# Altium PCB PCB_all_try_6_traced.PcbDoc (part 3 of 5)
Units mm, origin at the board's own origin, x right, y up, seen from the top; angles counter-clockwise.
Board outline 425 x 295 mm, 2 copper layers (Top Layer, Bottom Layer); 484 components, 419 nets, 1569 pads, 847 vias.
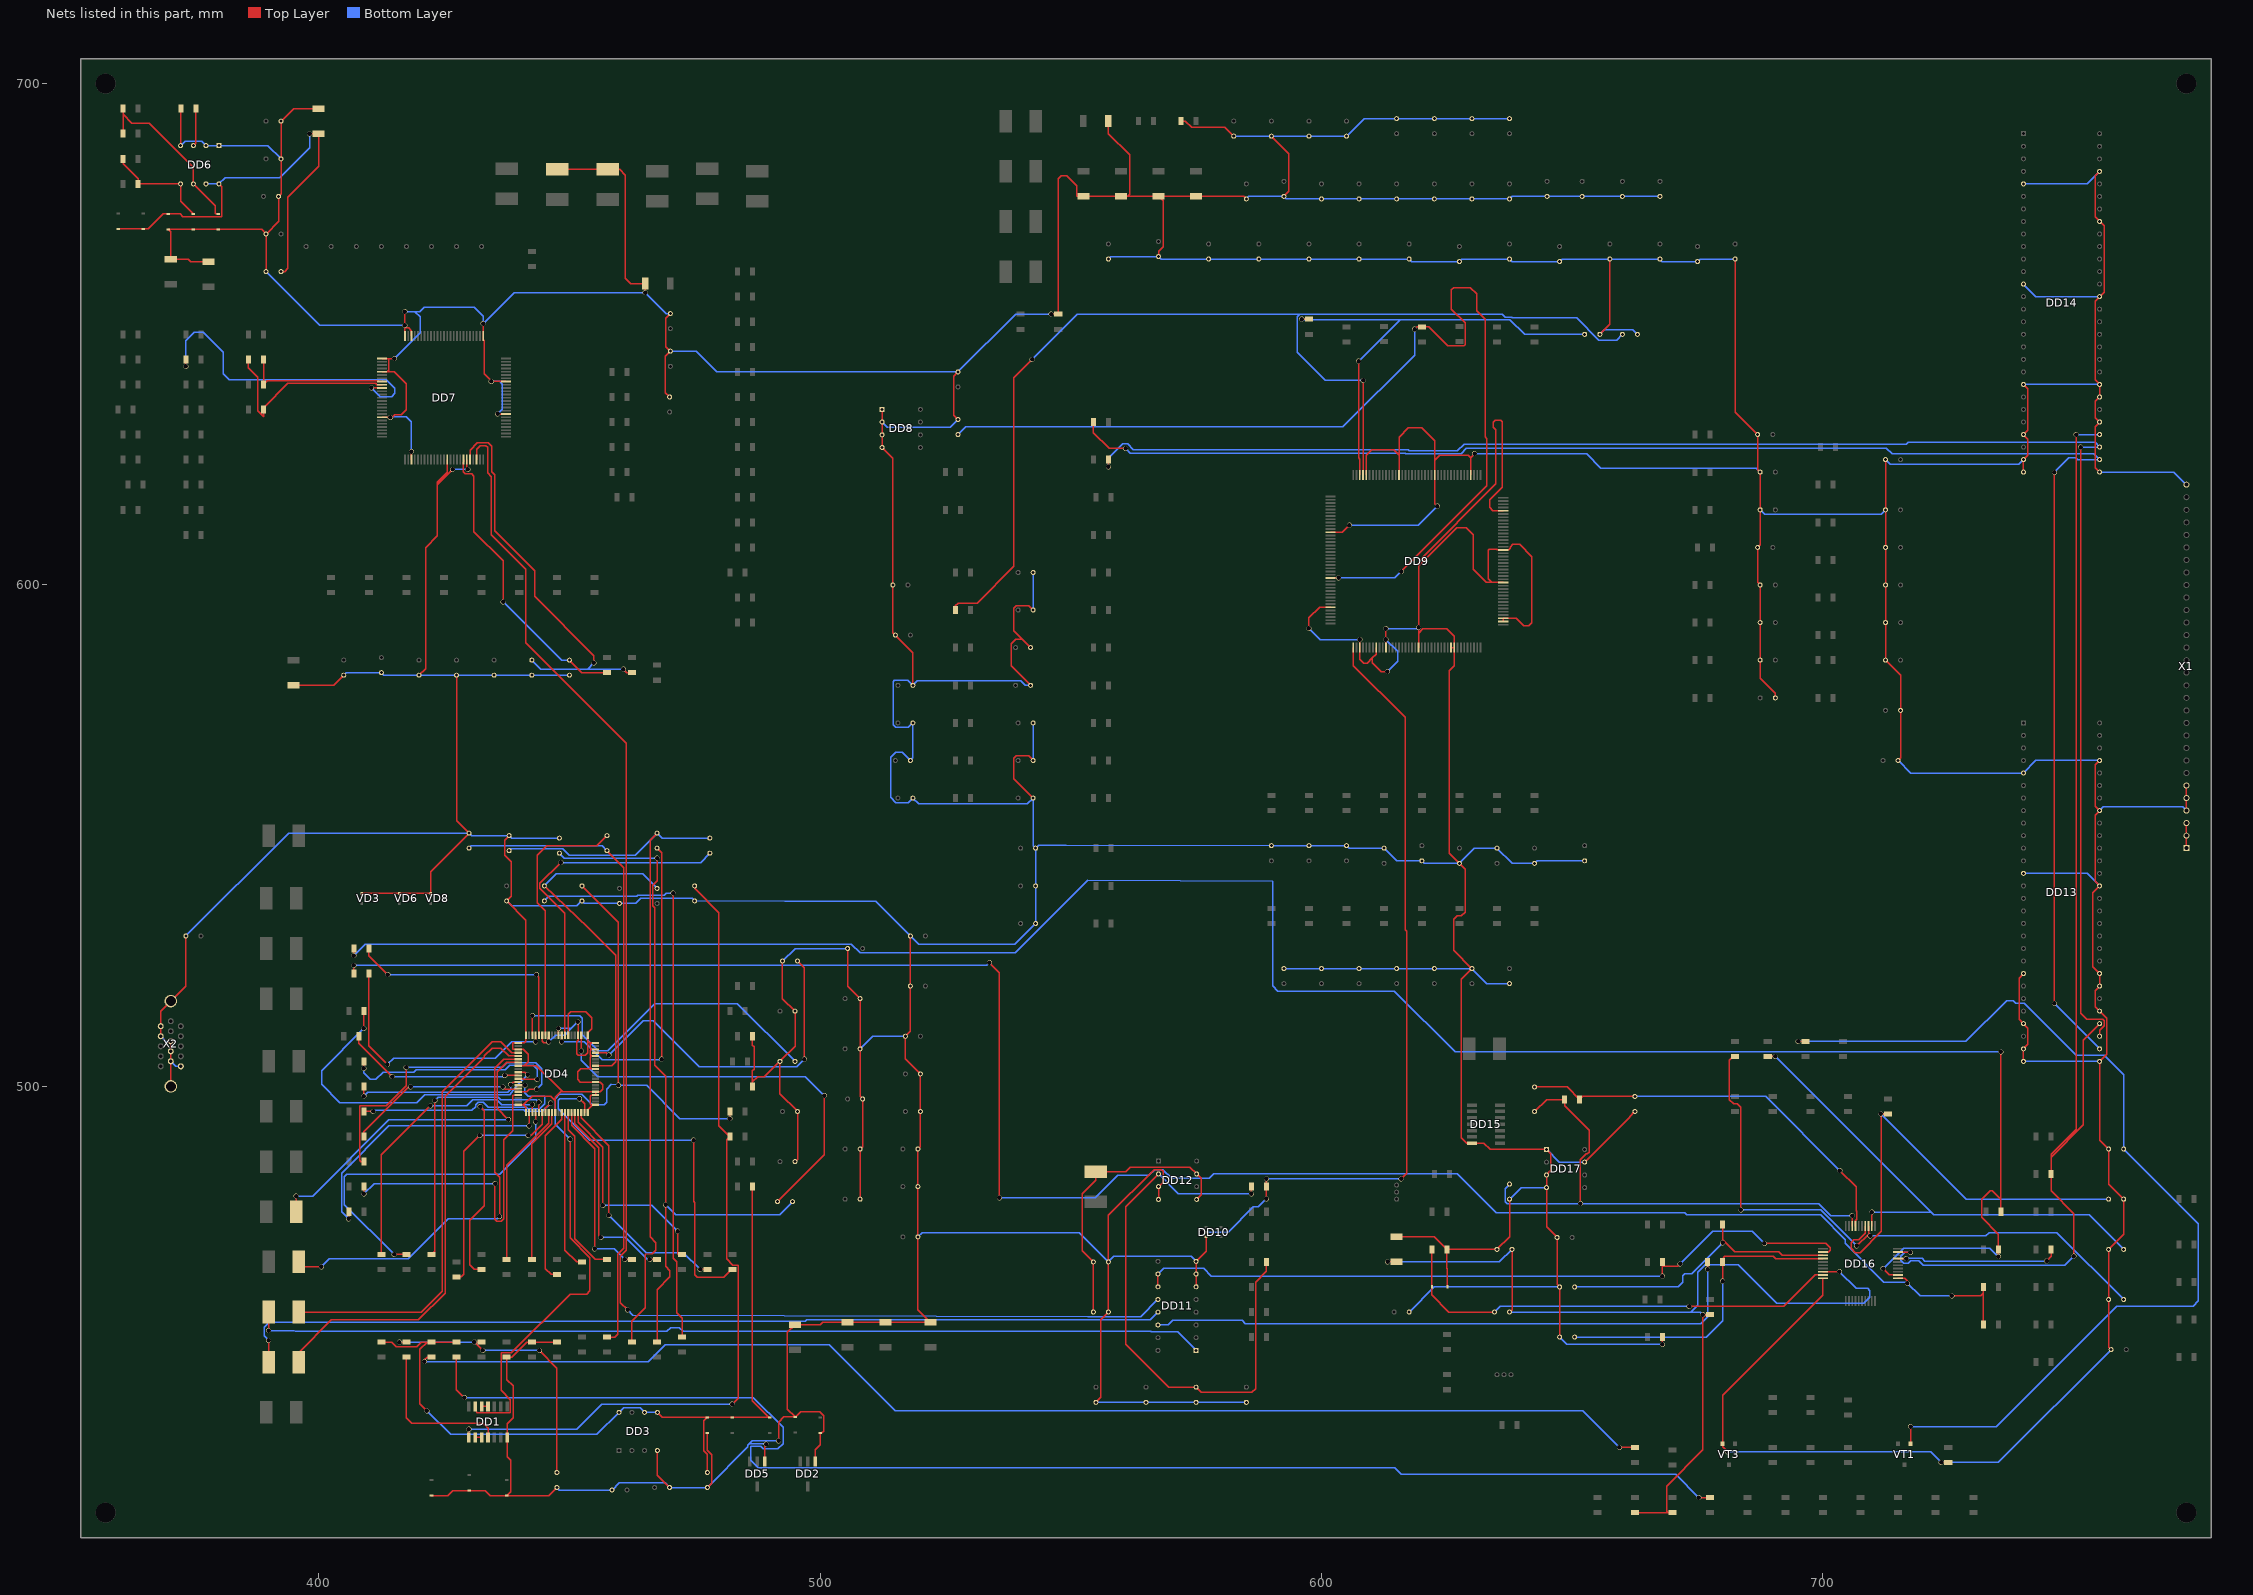
[diagram p3: the nets of this part, all layers, seen from the top]

## Via types
v1: diameter 1, hole 0.9, Top Layer to Bottom Layer, 847 vias

## Nets (pads, with @x,y where several pads share a name; then routed paths per layer and width w, separated by ;. In a path a pad name is that pad's centre, name@x,y a point inside that pad or via, vN(x,y) a via of type N, cw(c..) or ccw(c..) an arc to the next point about the centre after c; other vN are vias at no path point) (continued)
GND: C1.2 C2.2 C3.2 C4.2 C5.2 C6.2 C7.2 C8.2 C9.2 C10.2 C11.2 C12.2 C13.2 C14.2 C15.2 C17.2 C18.2 C19.2 C25.1 C26.2 C27.1 C28.2 C29.1 C30.2 C31.2 C32.2 C33.2 C34.2 C35.2 C36.2 C37.2 C38.2 C39.2 C40.2 C41.2 C42.2 C43.2 C44.1 C45.1 C46.1 C47.1 C48.1 C49.1 C50.1 C51.1 C52.2 C53.1 C54.1 C55.1 C56.1 C57.2 C58.1 C59.1 C60.1 C61.1 C62.1 C63.1 C64.2 C65.1 C66.1 C67.1 C68.1 C69.1 C70.1 C71.1 C72.1 C73.1 C74.1 C75.1 C76.1 C77.1 C78.1 C79.1 C80.1 C81.1 C82.1 C83.1 C84.1 C85.1 C86.1 C87.1 C88.1 C89.1 C90.1 C91.1 C92.1 C93.1 C94.1 C95.1 C96.1 C97.1 C98.1 C99.1 C100.1 C101.1 C102.1 C103.1 C104.1 C105.1 C106.1 C107.1 C108.1 C109.1 C110.1 C111.1 C112.1 C113.1 C114.1 C115.1 C116.1 C117.1 C118.1 C119.1 C120.1 C121.1 C122.1 C123.1 C124.1 C125.1 C126.1 C127.1 C128.2 C129.2 C130.1 C131.2 C132.2 C133.2 C134.2 C135.2 C136.2 C137.2 C138.1 C139.1 C140.1 C141.1 C142.1 C143.1 C144.1 C145.1 C146.1 C147.1 C148.1 C149.1 C150.1 C151.1 C152.1 C153.1 C154.1 C155.1 C156.1 C157.1 C158.2 C159.1 C160.2 C161.2 C162.1 C163.2 C164.2 C165.1 C166.2 C168.2 C169.2 C170.2 C171.2 C172.1 DD1.7 DD2.1 DD3.4 DD4.1 DD4.10 DD4.20 DD4.21 DD4.24 DD4.25 DD4.28 DD4.32 DD4.36 DD4.38 DD4.40 DD4.41 DD4.44 DD4.47 DD4.50 DD4.53 DD4.55 DD4.60 DD4.61 DD4.63 DD4.68 DD4.80 DD5.1 DD6.1 DD6.2 DD6.4 DD7.1 DD7.5 DD7.19 DD7.28 DD7.39 DD7.45 DD7.58 DD7.68 DD7.76 DD7.98 DD7.100 DD8.1 DD8.2 DD8.3 DD8.4 DD9.12 DD9.35 DD9.43 DD9.48 DD9.51 DD9.61 DD9.71 DD9.72 DD9.82 DD9.83 DD9.94 DD9.104 DD9.116 DD9.124 DD9.135 DD9.146 DD9.156 DD10.3 DD11.6 DD11.7 DD11.8 DD12.3 DD12.4 DD13.5 DD13.13 DD13.21 DD13.25 DD13.27 DD13.28 DD13.29 DD13.33 DD13.35 DD13.36 DD13.43 DD13.49 DD13.53 DD14.5 DD14.13 DD14.21 DD14.25 DD14.27 DD14.28 DD14.29 DD14.33 DD14.35 DD14.36 DD14.43 DD14.49 DD14.53 DD15.7 DD16.20 DD17.1 DD17.3 DD17.4 DD17.7 L16.1 L17.1 R3.1 R5.1 R15.1 R16.1 R17.1 R49.1 R178.1 R180.1 R204.1 R205.1 R218.1 VD1.1 VD2.1 VD3.1 VD4.1 VD5.1 VD6.1 VD7.1 VD8.1 VD11.1 VD12.1 VD13.1 VD14.1 VD17.1 VT3.2 X1.4 X1.5 X1.6 X1.30 X2.4 X2.5 X2.6 X2.7 X2.8 X2.11 X2.16 X2.17 | length 3756
  Top Layer w0.25: X2.4@368.5,510 368.455,510.045 368.455,511.955 X2.5@368.5,512 368.5,515 X2.16@370.5,517 373.5,520 C172.1@373.5,530 ; X2.17@370.5,500 X2.6@370.5,505 X2.7@370.5,507 X2.8@370.5,509 ; DD6.4@372.46,687.62 372.46,691.286 372.5,691.326 R49.1@372.5,695 ; C41.2@378,664.5 374.49,664.5 373.99,665 C57.2@370.5,665 370.5,670.4 VD14.1@370,670.9 VD13.1@375,670.9 VD12.1@380,670.9 388.6,670.9 C44.1@389.5,670 ; C49.1@389.5,662.5 C44.1@389.5,670 ; C43.2@395,580 403,580 C46.1@405,582 ; C52.2@400,695 395,695 C60.1@392.5,692.5 C59.1@392.5,685 392.5,678 C58.1@392,677.5 392,672.5 C44.1@389.5,670 ; VD3.1@408.6,538.5 VD6.1@416.1,538.5 VD8.1@422.35,538.5 422.35,542.85 C17.2@430,550.5 427.5,553 C53.1@427.5,582 ; DD7.19@412.65,633.45 v1(414.274,633.45) 414.624,633.45 415.158,633.984 416.484,633.984 417.477,634.977 417.477,640.103 415.03,642.55 413.671,642.55 ; DD7.5@412.65,642.55 413.671,642.55 ; DD7.1@412.65,645.15 413.995,645.15 ; v1(415.087,645.15) 413.995,645.15 ; DD7.100@417.2,649.7 v1@417.2,651.616 ; v1(417.2,654.523) v1(417.2,651.789) v1@417.2,651.616 ; v1(418.49,626.618) 418.5,626.608 DD7.28@418.5,625 ; DD7.98@418.5,649.7 418.5,650.748 417.921,651.327 417.489,651.327 v1@417.2,651.616 ; C51.1@420,582 421.31,583.31 421.31,607.466 423.621,609.778 423.621,619.963 ; VD4.1@422.5,418.4 425.729,418.4 426.729,419.4 VD1.1@430,419.4 433.248,419.4 434.248,418.4 VD2.1@437.5,418.4 ; DD7.39@425.65,625 425.65,622.475 423.621,620.446 423.621,619.963 ; v1(426.72,623.062) 423.621,619.963 ; DD7.45@429.55,625 429.55,623.255 v1(429.743,623.062) ; v1(432.8,652.124) DD7.76@432.8,649.7 432.8,648.947 433.031,648.716 433.031,642.112 v1@434.543,640.6 ; v1(434.418,640.6) v1@434.543,640.6 ; v1(435.712,634.111) 435.723,634.1 DD7.58@437.35,634.1 ; DD7.68@437.35,640.6 v1@434.543,640.6 ; C18.2@438,550 437.109,549.109 437.109,546.125 438.404,544.83 438.404,537.904 C10.2@437.5,537 441.325,533.175 DD4.60@441.325,510.222 441.325,509.016 440.984,508.675 DD4.61@439.778,508.675 438.709,508.675 438.709,507.375 DD4.63@439.778,507.375 440.832,507.375 441.8,506.408 441.8,504.952 440.973,504.125 ; DD4.80@439.778,496.325 440.842,496.325 ; DD4.68@439.778,504.125 440.973,504.125 ; DD4.1@441.325,494.778 441.325,495.808 440.842,496.325 ; DD4.55@444.575,510.222 444.575,509.016 444.901,508.69 445.702,508.69 445.723,508.881 DD4.53@445.875,510.222 v1(445.875,508.864) ; DD4.10@447.175,494.778 447.175,497.172 ; C11.2@447.5,420 445.9,418.4 VD2.1@437.5,418.4 ; R17.1@447.5,449 R16.1@442.5,449 441.48,449 438.48,446 R15.1@437.5,446 437.5,441.518 438.759,440.259 438.759,433.868 437.58,432.689 DD1.7@437.58,430 437.58,426.096 438.277,425.399 438.277,419.177 VD2.1@437.5,418.4 ; L17.1@447.62,682.88 L16.1@457.62,682.88 460.018,682.88 461.162,681.736 461.162,661.213 462.28,660.095 C42.2@465.12,660.095 ; DD4.50@447.825,510.222 447.825,511.579 v1(447.827,511.581) ; DD4.47@449.775,510.222 449.775,514.393 450.24,514.858 453.227,514.858 454.412,513.674 454.412,511.48 453.675,510.743 DD4.41@453.675,510.222 453.675,509.016 ; v1(451.714,512.877) 451.725,512.865 DD4.44@451.725,510.222 451.725,509.168 451.485,508.928 451.485,506.476 451.79,506.171 453.136,506.171 453.675,506.71 453.675,509.016 ; DD4.20@453.675,494.778 453.675,495.3 DD4.21@454.7,496.325 ; DD4.21@455.222,496.325 DD4.21@454.7,496.325 ; DD4.32@455.222,503.475 454.406,503.475 ; DD4.36@455.222,506.075 454.406,506.075 ; DD4.38@455.222,507.375 454.406,507.375 ; DD4.40@455.222,508.675 454.406,508.675 ; C42.2@465.12,660.12 C42.2@465.12,660.095 ; v1(465.125,658.292) 465.12,658.297 C42.2@465.12,660.095 ; DD3.4@467.54,427.38 467.54,422.46 C37.2@470,420 ; C50.1@470,637.5 469.138,638.362 469.138,645.638 C47.1@470.12,646.62 469.24,647.5 469.24,653.24 C45.1@470.12,654.12 ; C15.2@477.5,420 478.384,420.884 478.384,426.517 477.5,427.4 VD11.1@477.5,430.9 ; R5.1@486.5,500 486.5,500.888 ; R3.1@486.5,510 486.5,508.233 486.829,507.904 486.829,503.415 486.5,503.086 486.5,500.888 ; DD5.1@489,425.175 489,428.446 v1(489.229,428.676) ; v1(491.719,429.311) 491.719,433.059 492.76,434.1 VD7.1@495,434.1 ; C29.1@492.5,525 492.5,517.5 C28.2@495,515 495,508 C27.1@492,505 ; C25.1@495,485 495.5,485.5 C26.2@495.5,495 492,498.5 C27.1@492,505 ; DD2.1@499,425.175 499,427.533 500,428.533 VD5.1@500,430.9 500.38,430.9 500.685,431.205 500.685,434.34 499.948,435.077 496.124,435.077 495.148,434.1 VD7.1@495,434.1 ; C38.2@505.5,527.5 505.5,520 C30.2@508,517.5 C31.2@508,507.5 508,498 C32.2@508.5,497.5 508.5,488 C33.2@508,487.5 C34.2@508,477.5 ; DD8.1@512.38,635.04 DD8.2@512.38,632.5 DD8.3@512.38,629.96 DD8.4@512.38,627.42 514.5,625.3 C110.1@514.5,600 514.5,590.5 C107.1@515,590 518.5,586.5 C104.1@518.5,580 ; C36.2@518,530 C12.2@518,520 518,511 C9.2@517,510 517,505.5 C5.2@520,502.5 C4.2@520,495 520,488 C3.2@519.5,487.5 C2.2@519.5,480 C1.2@519.5,470 519.5,455.5 C6.2@522,453 C14.2@513,453 C35.2@505.5,453 500.499,453 499.999,452.5 C40.2@495,452.5 493.471,450.971 493.471,435.629 VD7.1@495,434.1 ; C90.1@527.5,633 526.618,633.882 526.618,641.618 C62.1@527.5,642.5 ; C121.1@542,580 538.099,583.901 538.099,588.264 538.988,589.153 540.347,589.153 ; C123.1@542,587.5 540.347,589.153 ; C113.1@542.5,557.5 538.607,561.393 538.607,565.404 539.115,565.912 541.588,565.912 C116.1@542.5,565 ; C125.1@542.5,595 541.616,595.884 539.115,595.884 538.607,595.376 538.607,590.893 540.347,589.153 ; v1(546.075,654.025) 546.099,654 R178.1@547.497,654 ; R178.1@547.5,654 R178.1@547.497,654 ; C130.1@555,437 556.006,438.006 556.006,453.506 C133.2@557.5,455 C132.2@557.5,465 557.5,474.296 566.623,483.419 568.09,483.419 568.401,483.108 568.401,480.901 DD12.3@567.5,480 DD12.4@567.5,477.46 ; C64.2@557.5,692.5 557.5,690.021 561.721,685.8 561.721,677.881 561.34,677.5 ; C67.1@567.5,665.5 567.5,666.56 568.401,667.461 568.401,676.599 C136.2@567.5,677.5 ; R180.1@572,692.5 572.877,692.5 574.116,691.261 580.739,691.261 C139.1@582.5,689.5 ; DD11.6@575,460.04 DD11.7@575,462.58 DD11.8@575,465.12 577,467.12 DD10.3@577,470 ; C138.1@585,677 584.5,677.5 C135.2@575,677.5 C136.2@567.5,677.5 ; C142.1@590,689.5 593.496,686.004 593.496,678.496 C141.1@592.5,677.5 ; v1(597.481,591.369) 597.481,593.417 599.614,595.55 DD9.35@601.8,595.55 ; DD9.12@601.8,610.5 604.139,610.5 v1(605.576,611.937) ; v1(607.65,589.128) DD9.43@607.65,587.5 607.65,585.216 608.435,584.431 609.133,584.431 610.163,585.46 ; DD9.156@608.95,621.95 608.95,625.856 610.017,626.923 614.383,626.923 615.467,625.839 ; DD9.48@610.9,587.5 610.9,586.197 610.163,585.46 ; DD9.51@612.85,587.5 v1(612.85,589.127) v1(612.85,591.312) ; v1(613.139,582.733) 611.879,582.733 610.163,584.448 610.163,585.46 ; C163.2@615,470 622.5,470 R205.1@625,467.5 ; DD9.146@615.45,621.95 615.45,622.808 615.467,622.808 615.467,625.839 ; DD9.61@619.35,587.5 619.35,590.419 ; v1(623.108,615.741) 622.6,616.249 DD9.135@622.6,621.95 622.6,624.84 ; VD17.1@625.1,460 625.1,463.677 625,463.777 R205.1@625,467.5 ; DD9.71@625.85,587.5 DD9.72@626.5,587.5 ; v1(630.555,626.186) 629.73,625.361 ; DD9.82@636.25,592.7 DD9.83@636.25,593.35 638.81,593.35 640.315,591.845 641.35,591.845 641.95,592.445 641.95,605.673 639.547,608.076 638.15,608.076 637.642,607.568 637.642,607.314 637.328,607 DD9.104@636.25,607 635.06,607 634.949,607.111 633.451,607.111 633.222,606.882 633.222,601.262 633.984,600.5 ; DD9.94@636.25,600.5 633.984,600.5 ; DD9.116@636.25,614.8 634.183,614.8 633.516,615.467 633.516,616.966 636.067,619.517 636.067,632.511 635.762,632.816 634.654,632.816 634.299,632.46 634.299,631.434 634.787,630.946 634.787,620.166 619.35,604.73 619.35,603.805 ; C161.2@637.5,477.5 637.5,470 C165.1@635,467.5 R205.1@625,467.5 ; C162.1@647.5,450 C159.1@647.5,460 647,460.5 C171.2@647,469.88 644.88,472 DD17.4@644.88,479.8 DD17.3@644.88,482.34 645.77,483.23 645.77,486.53 DD17.1@644.88,487.42 633.609,487.42 632.379,488.65 DD15.7@630,488.65 628.975,488.65 627.913,489.712 627.913,521.413 C115.1@630,523.5 626.364,527.136 626.364,533.324 627.05,534.01 627.888,534.01 628.65,534.772 628.65,543.35 C92.1@627.5,544.5 625.477,546.523 625.477,582.872 626.5,583.895 DD9.72@626.5,587.5 ; DD17.7@652.5,484.88 661.441,493.821 661.441,493.941 C160.2@662.5,495 ; C63.1@655.5,650 657.5,652 C85.1@657.5,665 ; v1(667.995,448.564) 668,448.569 R218.1@668,450 ; v1(681.016,427.101) 680,428.117 VT3.2@680,428.75 680,438.395 700,458.395 DD16.20@700,461.75 ; C98.1@682.5,665 682.5,634.5 C70.1@687,630 687,623 C72.1@687.5,622.5 C74.1@687.5,615 687.5,608 C76.1@687,607.5 687,600.5 C78.1@687.5,600 C82.1@687.5,592.5 C86.1@687.5,585 687.5,581.413 690.5,578.413 C91.1@690.5,577.5 ; C95.1@712.5,625 C99.1@712.5,615 C102.1@712.5,607.5 C105.1@712.5,600 C108.1@712.5,592.5 C111.1@712.5,585 715.5,582 C117.1@715.5,575 715.5,565.5 C114.1@715,565 ; v1(723.57,424.993) v1@723.577,425 ; v1(723.57,425) v1@723.577,425 ; R204.1@725,425 v1@723.577,425 ; DD13.28@740,505 DD13.27@740,507.5 740.893,508.393 740.893,511.607 DD13.25@740,512.5 739.115,513.385 739.115,521.615 DD13.21@740,522.5 ; DD14.28@740,622.5 DD14.27@740,625 740.893,625.893 740.893,629.107 DD14.25@740,630 740.893,630.893 740.893,639.107 DD14.21@740,640 ; DD13.53@755.2,565 754.321,564.121 754.321,555.879 DD13.49@755.2,555 754.304,554.104 754.304,540.896 DD13.43@755.2,540 753.817,538.617 753.817,523.883 DD13.36@755.2,522.5 DD13.35@755.2,520 754.304,519.104 754.304,515.896 DD13.33@755.2,515 756.583,513.617 756.583,506.383 DD13.29@755.2,505 755.2,489.3 C170.2@757,487.5 757,480.5 C164.2@760,477.5 760,470.5 C168.2@757,467.5 C166.2@757,457.5 757,448 C169.2@757.5,447.5 ; DD14.29@755.2,622.5 754.304,623.396 754.304,631.604 DD14.33@755.2,632.5 754.304,633.396 754.304,636.604 DD14.35@755.2,637.5 DD14.36@755.2,640 754.304,640.896 754.304,656.604 DD14.43@755.2,657.5 756.082,658.382 756.082,671.618 DD14.49@755.2,672.5 754.304,673.396 754.304,681.604 DD14.53@755.2,682.5 ; X1.4@772.5,555 X1.5@772.5,557.5 X1.6@772.5,560 ; 413.671,642.55 413.995,642.874 413.995,645.15 ; 440.842,496.325 442.563,498.046 446.301,498.046 447.175,497.172 ; 440.973,504.125 443.43,504.125 448.63,498.925 ; 447.175,497.172 447.175,497.84 448.26,498.925 448.63,498.925 ; 448.63,498.925 DD4.25@455.222,498.925 ; 453.675,509.016 454.016,508.675 454.406,508.675 ; 454.406,503.475 452.218,503.475 451.663,502.92 451.663,501.396 452.184,500.875 DD4.28@455.222,500.875 456.184,500.875 456.692,500.367 456.692,499.433 456.184,498.925 DD4.25@455.222,498.925 ; 454.406,503.475 454.152,503.729 454.152,505.821 454.406,506.075 ; 454.406,506.075 454.152,506.329 454.152,507.121 454.406,507.375 ; 454.406,507.375 454.152,507.629 454.152,508.421 454.406,508.675 ; DD4.21@454.7,496.325 454.406,496.325 454.152,496.579 454.152,498.021 454.406,498.275 DD4.24@455.222,498.275 DD4.25@455.222,498.925 ; 486.5,500.888 487.518,501.906 488.906,501.906 C27.1@492,505 ; R178.1@547.497,654 547.497,681.025 548.132,681.66 549.148,681.66 551.18,679.628 551.18,677.5 C137.2@552.5,677.5 C134.2@560,677.5 561.34,677.5 ; 561.34,677.5 C136.2@567.5,677.5 ; 615.467,625.839 615.467,629.488 617.347,631.368 619.984,631.368 622.6,628.752 622.6,624.84 ; 619.35,590.419 v1(619.35,591.53) 619.35,603.805 ; 619.35,590.419 620.243,591.312 624.951,591.312 626.5,589.763 DD9.72@626.5,587.5 ; 619.35,603.805 626.948,611.403 628.904,611.403 630.301,610.006 630.301,603.091 632.892,600.5 633.984,600.5 ; 622.6,624.84 623.616,625.856 629.234,625.856 629.73,625.361 ; 629.73,625.361 629.75,625.34 DD9.124@629.75,621.95 629.73,625.361
  Bottom Layer w0.25: X2.4@368.5,510 369.5,509 X2.8@370.5,509 ; X2.6@370.5,505 371.5,504 X2.11@372.5,504 ; DD6.4@372.46,687.62 373.358,688.518 376.642,688.518 DD6.2@377.54,687.62 DD6.1@380.08,687.62 389.88,687.62 C59.1@392.5,685 ; C172.1@373.5,530 394,550.5 C17.2@430,550.5 430.5,550 C18.2@438,550 438.5,549.5 C19.2@448,549.5 ; C49.1@389.5,662.5 400.211,651.789 v1(417.2,651.789) ; C46.1@405,582 405.5,582.5 C48.1@412.5,582.5 413,582 C51.1@420,582 C53.1@427.5,582 C54.1@435,582 C55.1@442.5,582 C56.1@450,582 ; v1(414.274,633.45) 414.366,633.542 417.484,633.542 418.49,632.536 v1(418.49,626.618) ; v1(415.087,645.15) 420.221,650.284 420.221,653.472 419.17,654.523 ; v1(417.2,654.523) 419.17,654.523 ; v1(426.72,623.062) v1(429.743,623.062) ; v1(434.418,640.6) 436.106,640.6 436.626,640.08 436.626,635.025 v1(435.712,634.111) ; C10.2@437.5,537 438.484,536.016 451.516,536.016 C7.2@452.5,537 453,536.5 C13.2@460,536.5 463.245,536.5 464.235,537.489 474.511,537.489 C8.2@475,537 493,536.921 511.079,536.921 C36.2@518,530 519.68,528.32 538.82,528.32 C80.1@543,532.5 C80.1@543,532.5 543.001,537.312 543,537.313 C84.1@543,540 C88.1@543,547.5 ; v1(445.875,508.864) 447.247,510.235 449.072,510.235 450.418,511.581 ; C11.2@447.5,420 448,419.5 C39.2@458.5,419.5 459.903,420.903 469.097,420.903 C37.2@470,420 C15.2@477.5,420 485.593,428.093 485.593,428.417 ; v1(447.827,511.581) 450.418,511.581 ; v1(451.714,512.877) 450.418,511.581 ; C47.1@470.12,646.62 475.285,646.62 479.405,642.5 C62.1@527.5,642.5 539.025,654.025 v1(546.075,654.025) ; C45.1@470.12,654.12 469.297,654.12 v1(465.125,658.292) 438.967,658.292 v1(432.8,652.124) 432.8,653.618 431.012,655.406 421.015,655.406 420.131,654.523 419.17,654.523 ; v1(489.229,428.676) 489.18,428.726 485.902,428.726 485.593,428.417 ; v1(491.719,429.311) 486.466,429.311 485.593,428.438 485.593,428.417 ; C29.1@492.5,525 495,527.5 C38.2@505.5,527.5 ; C31.2@508,507.5 510.5,510 C9.2@517,510 ; DD8.2@512.38,632.5 513.385,631.495 525.995,631.495 C90.1@527.5,633 ; C1.2@519.5,470 520.344,470.844 551.656,470.844 C132.2@557.5,465 558.615,466.115 574.005,466.115 DD11.8@575,465.12 ; C121.1@542,580 540.944,580 540.046,580.898 519.398,580.898 C104.1@518.5,580 517.532,580.968 514.827,580.968 514.604,580.746 514.604,572.11 515.112,571.602 517.602,571.602 C101.1@518.5,572.5 518.5,565.5 C97.1@518,565 516.351,566.649 515.112,566.649 514.096,565.633 514.096,557.632 515.112,556.616 517.616,556.616 C93.1@518.5,557.5 519.664,556.336 541.336,556.336 C113.1@542.5,557.5 542.5,548 C88.1@543,547.5 ; C116.1@542.5,565 542.519,565.019 542.519,567.258 542.5,567.277 C119.1@542.5,572.5 ; C125.1@542.5,595 542.519,595.019 542.519,596.9 542.5,596.919 C127.1@542.5,602.5 ; C130.1@555,437 C131.2@565,437 C129.2@575,437 C128.2@585,437 ; C66.1@557.5,665 558,665.5 C67.1@567.5,665.5 568,665 C65.1@577.5,665 C69.1@587.5,665 C68.1@597.5,665 C71.1@607.5,665 C73.1@617.5,665 618,664.5 C75.1@627.5,664.5 628,665 C77.1@637.5,665 638,664.5 C81.1@647.5,664.5 648,665 C85.1@657.5,665 C89.1@667.5,665 668,664.5 C94.1@675,664.5 675.5,665 C98.1@682.5,665 ; C139.1@582.5,689.5 C142.1@590,689.5 C145.1@597.5,689.5 C148.1@605,689.5 608.5,693 C149.1@615,693 C146.1@622.5,693 C143.1@630,693 C140.1@637.5,693 ; C138.1@585,677 585.5,677.5 C141.1@592.5,677.5 593,677 C144.1@600,677 C147.1@607.5,677 C150.1@615,677 C151.1@622.5,677 C152.1@630,677 C153.1@637.5,677 638,677.5 C154.1@645,677.5 C155.1@652,677.5 C156.1@660,677.5 C157.1@667.5,677.5 ; C126.1@592.5,523.5 C124.1@600,523.5 C122.1@607.5,523.5 C120.1@615,523.5 C118.1@622.5,523.5 C115.1@630,523.5 633,520.5 C112.1@637.5,520.5 ; v1(597.481,591.369) 599.722,589.128 v1(607.65,589.128) ; v1(605.576,611.937) 619.304,611.937 v1(623.108,615.741) ; v1(612.85,589.127) 615.213,586.764 615.213,584.807 v1(613.139,582.733) ; v1(612.85,591.312) 619.132,591.312 v1(619.35,591.53) ; C158.2@617.5,455 622.5,460 C159.1@647.5,460 ; v1(630.555,626.186) 652.856,626.186 655.726,623.316 686.684,623.316 C72.1@687.5,622.5 ; C161.2@637.5,477.5 639.8,479.8 DD17.4@644.88,479.8 ; DD17.1@644.88,487.42 647.42,484.88 DD17.7@652.5,484.88 ; C162.1@647.5,450 648.936,448.564 v1(667.995,448.564) ; C79.1@652.5,545 643,545 C83.1@642.5,544.5 638,544.5 C87.1@635,547.5 630.5,547.5 C92.1@627.5,544.5 620.5,544.5 C96.1@620,545 615,545 C100.1@612.5,547.5 605.5,547.5 C103.1@605,548 C106.1@597.5,548 C109.1@590,548 549.091,548.122 543.622,548.122 C88.1@543,547.5 ; C63.1@655.5,650 656.4,650.9 662.1,650.9 C61.1@663,650 ; v1(681.016,427.101) 721.469,427.101 v1(723.57,425) ; C74.1@687.5,615 688.404,614.096 711.596,614.096 C99.1@712.5,615 ; C95.1@712.5,625 713.397,624.103 739.103,624.103 DD14.27@740,625 ; C114.1@715,565 717.5,562.5 DD13.5@740,562.5 742.5,565 DD13.53@755.2,565 ; v1(723.57,424.993) 734.993,424.993 C169.2@757.5,447.5 ; DD13.28@740,505 DD13.29@755.2,505 ; DD13.13@740,542.5 752.7,542.5 DD13.43@755.2,540 ; DD14.21@740,640 DD14.36@755.2,640 ; DD14.13@740,660 742.5,657.5 DD14.43@755.2,657.5 ; DD14.5@740,680 752.7,680 DD14.53@755.2,682.5 ; DD13.49@755.2,555 755.958,555.758 771.742,555.758 X1.4@772.5,555 ; DD14.29@755.2,622.5 770,622.5 X1.30@772.5,620
HP_SENSE: DD16.37 R217.2 | length 32.6
  Top Layer w0.25: DD16.37@714.95,465.65 v1(716.585,465.65) ; v1(744.601,465.176) 745.5,466.075 R217.2@745.5,467.5
  Bottom Layer w0.25: v1(716.585,465.65) 716.668,465.733 719.773,465.733 720.331,465.176 v1(744.601,465.176)
HSYNC_D: DD7.48 DD11.12 | length 296.9
  Top Layer w0.25: DD7.48@431.5,625 431.5,627.117 432.195,627.812 433.324,627.812 433.68,627.456 433.68,622.402 434.467,621.614 434.467,609.981 441.3,603.148 441.3,588.493 461.391,568.401 461.391,467.36 460.182,466.151 460.182,456.834 v1(461.594,455.422)
  Bottom Layer w0.25: v1(461.594,455.422) 462.61,454.406 553.415,454.101 563.981,454.101 DD11.12@567.38,457.5
HSYNC_IN: DD11.14 R184.1 | length 121.8
  Top Layer w0.25: R184.1@677,465 677,463.587 v1(677.012,463.575)
  Bottom Layer w0.25: DD11.14@567.38,452.42 569.423,452.42 570.317,453.314 584.2,453.314 584.835,452.679 675.64,452.679 677.012,454.05 v1(677.012,463.575)
HSYNC_X: DD9.41 DD10.2 R170.1 | length 158.3
  Top Layer w0.25: v1(576.072,470.95) DD10.2@577,470.95 ; v1(589,477.557) R170.1@589,480 v1(589,481.533) ; DD9.41@606.35,587.5 606.35,583.898 616.675,573.573 616.675,568.31 616.747,568.237 616.747,531.258 617.017,530.989 617.017,482.676 v1(615.874,481.533)
  Bottom Layer w0.25: v1(576.072,470.95) 581.377,470.95 586.416,475.989 587.432,475.989 v1(589,477.557) ; v1(589,481.533) v1(615.874,481.533)
INPUT_SELECT: DD11.10 DD11.11 DD16.12 R181.1 | length 146.9
  Top Layer w0.25: DD11.11@567.38,460.04 DD11.10@567.38,462.58 ; v1(668,462.178) 668,464.103 ; R181.1@668,465 668,464.103 ; v1(671.525,464.591) 671.037,464.103 668,464.103 ; v1(688.34,468.681) 700.608,468.681 701.421,467.868 701.421,467.331 701.04,466.95 DD16.12@700,466.95
  Bottom Layer w0.25: DD11.10@567.38,462.58 568.537,463.737 576.496,463.737 578.055,462.178 v1(668,462.178) ; v1(671.525,464.591) 678.019,471.085 685.936,471.085 v1(688.34,468.681)
LCD_CLK: DD13.31 DD14.31 R130.1 | length 329.1
  Top Layer w0.25: R130.1@557.5,625 557.5,623.575 v1(557.505,623.57) ; v1(751.408,627.5) 751.408,514.629 752.659,513.379 755.78,513.379 756.079,513.08 756.079,512.064 755.2,511.185 DD13.31@755.2,510
  Bottom Layer w0.25: v1(557.505,623.57) 557.505,625.313 560.324,628.132 561.34,628.132 562.473,626.999 617.275,626.999 617.546,626.728 627.085,626.728 628.434,628.077 716.656,628.077 717,628.421 754.279,628.421 DD14.31@755.2,627.5 v1(751.408,627.5)
LCD_DE: DD13.30 DD14.30 R129.1 | length 335
  Top Layer w0.25: R129.1@554.5,632.5 554.5,630.385 557.632,627.253 v1(560.934,627.253) ; v1(746.15,516.55) v1(746.15,622.452)
  Bottom Layer w0.25: v1(560.934,627.253) 561.899,626.288 616.712,626.288 616.788,626.212 627.83,626.212 628.904,627.285 712.64,627.285 713.79,626.135 754.065,626.135 DD14.30@755.2,625 750.801,625 750.452,625.349 749.047,625.349 v1(746.15,622.452) ; v1(746.15,516.55) DD13.30@755.2,507.5
LCD_VCC: X1.1 X1.2 X1.3 | length 5
  Top Layer w0.25: X1.1@772.5,547.5 X1.2@772.5,550 X1.3@772.5,552.5
LVDS_PD: DD13.32 DD14.32 DD16.39 R213.2 | length 244.9
  Top Layer w0.25: DD16.39@714.95,466.95 717.376,466.95 v1(717.448,466.877) ; v1(750.062,466.141) 750.062,474.609 745.5,479.171 R213.2@745.5,482.5 745.5,485.861 ; v1(750.519,630) 750.519,491.49 745.5,486.471 745.5,485.861 ; DD13.32@755.2,512.5 751.942,509.242 751.942,492.303 745.5,485.861
  Bottom Layer w0.25: v1(717.448,466.877) 716.28,466.877 715.518,466.115 715.518,465.328 716.077,464.769 717.014,464.769 717.474,465.229 719.071,465.229 720.014,464.287 748.208,464.287 v1(750.062,466.141) ; v1(750.519,630) DD14.32@755.2,630
MCU_H_IN: DD11.13 L11.2 | length 186.9
  Top Layer w0.25: L11.2@390,445 v1(390,449.343)
  Bottom Layer w0.25: v1(390,449.343) 389.103,450.24 389.103,451.968 390.144,453.009 444.678,453.009 444.83,453.161 497.027,453.161 497.332,453.466 565.886,453.466 DD11.13@567.38,454.96
MCU_ISP_SCL: R12.1 R185.1 | length 253.3
  Top Layer w0.25: v1(421.083,445.11) 421.083,445.443 421.64,446 R12.1@422.5,446 ; v1(659.409,428) R185.1@662.5,428
  Bottom Layer w0.25: v1(421.083,445.11) 465.767,445.11 469.146,448.488 501.853,448.488 515.01,435.331 652.079,435.331 v1(659.409,428)
MCU_ISP_SDA: R13.1 R186.1 | length 282.2
  Top Layer w0.25: R13.1@427.5,446 427.482,446 427.482,439.522 v1(429.057,437.947) ; v1(675.284,418) R186.1@677.5,418
  Bottom Layer w0.25: v1(429.057,437.947) 486.715,437.947 492.608,432.054 492.608,428.752 491.566,427.711 488.648,427.711 488.137,428.222 486.261,428.222 486.181,428.142 486.181,425.475 487.68,423.977 614.629,423.977 615.95,422.656 670.628,422.656 v1(675.284,418)
MCU_SCL1: DD16.32 R24.1 R230.2 R234.1 | length 442.7
  Top Layer w0.25: R24.1@407,527.5 407,526.094 v1(407.01,526.085) ; v1(712.013,463.652) 713.264,462.4 DD16.32@714.95,462.4 ; v1(735,466.065) R234.1@735,467.5 735,470.535 731.672,473.862 731.672,477.52 733.374,479.222 733.798,479.222 735.5,477.52 ; R230.2@735.5,475 735.5,477.52 ; v1(735.5,506.908) 735.5,477.52
  Bottom Layer w0.25: v1(407.01,526.085) 409.321,528.396 506.222,528.396 508,526.618 538.886,526.618 553.339,541.071 590.296,540.868 590.296,520.04 591.312,519.024 614.553,519.024 626.669,506.908 v1(735.5,506.908) ; v1(712.013,463.652) 716.118,467.756 733.308,467.756 v1(735,466.065)
MCU_SDA1: DD16.31 R23.1 R229.2 R235.1 | length 396.9
  Top Layer w0.25: R23.1@407,522.5 v1(407,524.121) ; v1(533.781,524.662) 535.762,522.681 v1(535.762,477.749) ; DD16.31@714.95,461.75 716.349,461.75 716.861,461.239 v1(716.861,460.731) ; v1(725.729,458.216) 731.492,458.216 732,458.724 ; R229.2@732,452.5 732,458.724 ; R235.1@732,460 732,458.724
  Bottom Layer w0.25: v1(407,524.121) 533.24,524.121 v1(533.781,524.662) ; v1(535.762,477.749) 554.914,477.749 559.41,482.244 565.556,482.244 566.731,483.419 568.376,483.419 570.135,481.66 577.621,481.66 578.51,482.549 627.109,482.549 634.854,474.805 672.429,474.805 672.854,474.38 699.522,474.38 704.477,469.425 704.477,468.67 712.163,460.985 716.607,460.985 v1(716.861,460.731) 719.375,458.216 v1(725.729,458.216)
MCU_V_IN: DD11.1 L10.2 | length 191
  Top Layer w0.25: v1(390,451.282) L10.2@390,455
  Bottom Layer w0.25: v1(390,451.282) 395.15,451.282 395.303,451.129 469.428,451.129 470.194,451.895 471.952,451.895 472.718,451.129 565.997,451.129 566.089,451.037 571.303,451.037 DD11.1@575,447.34
NetC7_1: C7.1 DD1.13 R6.2 | length 176.8
  Top Layer w0.25: DD1.13@431.23,436.2 431.546,434.873 438.255,434.873 438.255,437.54 436.372,439.423 436.372,446.837 438.429,446.837 450.139,458.546 453.415,458.546 454.101,459.232 454.101,465.836 450.139,469.798 v1(450.139,489.458) ; C7.1@452.5,540 459.791,532.709 v1(459.791,500.228) ; v1(481.99,493.582) 482,493.592 R6.2@482,495
  Bottom Layer w0.25: v1(450.139,489.458) 447.132,492.465 447.132,497.578 447.968,498.414 452.486,498.414 454.609,496.291 456.946,496.291 457.479,496.824 457.479,499.466 458.394,500.38 459.793,500.35 465.404,500.228 ; v1(459.791,500.228) 465.404,500.228 ; v1(481.99,493.582) 472.049,493.582 465.404,500.228
NetC8_1: C8.1 DD1.1 R7.2 | length 164.8
  Top Layer w0.25: DD1.1@429.96,430 429.96,431.611 v1(429.971,431.622) ; C8.1@475,540 475,539.496 479.831,534.665 479.831,492.169 R7.2@482,490 481.355,489.355 481.355,465.582 482.6,464.337 483.641,464.337 483.641,437.845 v1(482.448,436.651)
  Bottom Layer w0.25: v1(429.971,431.622) 451.46,431.622 456.489,436.651 v1(482.448,436.651)
NetC11_1: C11.1 R11.2 R14.1 | length 57.2
  Top Layer w0.25: v1(416.099,449) R11.2@417.5,449 ; v1(431.063,449.021) v1@431.085,449 ; R14.1@432.5,449 v1@431.085,449 ; v1(432.74,447.345) v1@431.085,449 ; v1(443.992,447.345) 447.5,443.837 C11.1@447.5,423
  Bottom Layer w0.25: v1(416.099,449) 431.042,449 v1(431.063,449.021) ; v1(432.74,447.345) v1(443.992,447.345)
NetC15_1: C15.1 DD3.5 DD3.6 DD3.8 R9.2 R10.2 R12.2 R13.2 VD9.2 VD10.2 VD11.2 | length 162.9
  Top Layer w0.25: R10.2@412.5,449 414.524,449 415.468,448.056 419.528,448.056 420.472,449 421.64,449 ; v1(421.589,435.305) 420.192,436.702 420.192,447.552 421.64,449 ; R13.2@427.5,449 R12.2@422.5,449 421.64,449 ; DD3.5@467.54,435 468.54,434 VD11.2@477.5,434 ; C15.1@477.5,423 477.5,426.613 476.809,427.304 476.809,433.309 VD11.2@477.5,434 ; R9.2@486.5,480 486.5,437.263 VD9.2@489.763,434 ; VD9.2@490,434 VD9.2@489.763,434 ; VD11.2@477.5,434 VD10.2@482.5,434 VD9.2@489.763,434
  Bottom Layer w0.25: v1(421.589,435.305) 426.314,430.581 455.501,430.581 DD3.8@459.92,435 460.809,435.889 464.111,435.889 DD3.6@465,435 DD3.5@467.54,435
NetC16_1: C16.1 C20.1 DD4.33 | length 70.2
  Top Layer w0.25: C20.1@445,540 453.736,531.641 459.269,526.108 459.269,504.924 458.47,504.125 DD4.33@455.222,504.125
  Bottom Layer w0.25: C20.1@445,540 447.417,542.417 464.583,542.417 C16.1@467.5,539.5
NetC17_1: C17.1 C21.2 R19.2 | length 128.8
  Top Layer w0.25: R19.2@457.5,450 459.068,450 459.678,450.61 459.678,466.499 460.883,467.704 460.883,543.617 C21.2@457.5,547
  Bottom Layer w0.25: C17.1@430,547.5 430.454,547.954 456.546,547.954 C21.2@457.5,547
NetC18_1: C18.1 C22.2 C23.2 R20.2 | length 148.2
  Top Layer w0.25: R20.2@462.5,449 462.483,449 462.483,453.18 465.176,455.873 465.176,466.522 466.572,466.659 467.272,467.36 467.272,468.818 466.117,469.973 466.117,549.117 C22.2@467.5,550.5
  Bottom Layer w0.25: C18.1@438,547 438.395,547.395 448.666,547.395 449.961,546.1 463.1,546.1 C22.2@467.5,550.5 468.5,549.5 C23.2@478,549.5
NetC19_1: C19.1 C24.2 R21.2 | length 146.4
  Top Layer w0.25: v1(467.487,545.541) 467.487,541.02 466.621,540.154 466.621,535.985 466.996,535.61 466.996,504.266 469.214,502.048 v1(469.214,476.377) 469.214,464.083 470.017,463.281 470.017,461.991 467.5,459.474 R21.2@467.5,449
  Bottom Layer w0.25: C19.1@448,546.5 448.959,545.541 v1(467.487,545.541) ; v1(469.214,476.377) 471.17,474.421 491.921,474.421 C24.2@494.5,477
NetC20_2: C20.2 R22.2 | length 115.6
  Top Layer w0.25: v1(470.687,538.531) 470.687,465.76 471.373,465.074 471.373,454.838 472.5,453.711 R22.2@472.5,450
  Bottom Layer w0.25: C20.2@445,537 445.896,537.896 463.423,537.896 463.644,538.117 468.881,538.117 469.295,538.531 v1(470.687,538.531)
NetC21_1: C21.1 DD4.54 | length 52
  Top Layer w0.25: DD4.54@445.225,510.222 445.225,535.012 443.617,536.62 443.617,546.106 445.516,548.005 455.505,548.005 C21.1@457.5,550
NetC22_1: C22.1 DD4.49 | length 65.2
  Top Layer w0.25: v1(448.475,508.864) DD4.49@448.475,510.222 ; C22.1@467.5,547.5 468.401,546.599 v1(468.401,505.46)
  Bottom Layer w0.25: v1(448.475,508.864) 452.986,508.864 456.511,505.338 468.279,505.338 v1(468.401,505.46)
NetC23_1: C23.1 DD4.48 | length 68.7
  Top Layer w0.25: v1(448.285,544.652) 444.121,540.489 444.121,539.496 449.125,534.492 DD4.48@449.125,510.222
  Bottom Layer w0.25: v1(448.285,544.652) 476.152,544.652 C23.1@478,546.5
NetC24_1: C24.1 DD4.43 | length 81.4
  Top Layer w0.25: v1(452.374,507.06) v1(452.374,507.06) DD4.43@452.375,510.222 ; C24.1@491.5,477 500.837,486.337 v1(500.837,498.17)
  Bottom Layer w0.25: v1(452.374,507.06) 452.374,505.257 455.701,501.929 497.078,501.929 v1(500.837,498.17)
NetC27_2: C27.2 DD4.58 | length 69.7
  Top Layer w0.25: DD4.58@442.625,510.222 v1(442.625,514.096)
  Bottom Layer w0.25: v1(442.625,514.096) 452.085,514.096 452.593,513.588 452.593,510.28 455.727,507.146 457.665,507.146 467.018,516.499 483.501,516.499 C27.2@495,505
NetC29_2: C29.2 DD4.37 | length 69.2
  Top Layer w0.25: DD4.37@455.222,506.725 457.383,506.725 v1(457.886,506.222) ; C29.2@495.5,525 496.875,523.625 v1(496.875,505.46)
  Bottom Layer w0.25: v1(457.886,506.222) 464.744,513.08 466.776,513.08 475.92,503.936 495.351,503.936 v1(496.875,505.46)
NetC49_2: C49.2 C52.1 DD6.7 DD6.8 VD14.2 VD15.2 VD16.2 | length 88.3
  Top Layer w0.25: VD16.2@360,671 VD15.2@365,671 365.989,671 368.989,674 VD14.2@370,674 372.353,674 372.923,673.43 380.695,673.43 380.695,679.385 DD6.8@380.08,680 ; C49.2@392.5,662.5 393.192,662.5 393.852,663.16 393.852,677.316 400.025,683.489 400.025,690 C52.1@400,690 398.179,690 v1(398.17,689.991)
  Bottom Layer w0.25: DD6.7@377.54,680 DD6.8@380.08,680 381.333,681.253 392.252,681.253 398.17,687.172 v1(398.17,689.991)
NetC55_2: C55.2 DD7.46 R98.1 | length 81.5
  Top Layer w0.25: DD7.46@430.2,625 430.2,626.872 431.648,628.32 433.832,628.32 434.492,627.659 434.492,622.63 435.102,622.021 435.102,610.819 443.052,602.869 443.052,597.738 454.863,585.927 v1(454.863,584.479) ; v1(460.756,583.235) 461.491,582.5 R98.1@462.5,582.5
  Bottom Layer w0.25: C55.2@442.5,585 444.265,583.235 453.619,583.235 ; v1(454.863,584.479) 453.619,583.235 ; v1(460.756,583.235) 453.619,583.235
NetC56_2: C56.2 DD7.44 R99.1 | length 59
  Top Layer w0.25: DD7.44@428.9,625 428.828,624.108 428.828,622.579 429.225,622.183 430.505,622.183 430.962,621.726 430.962,610.632 436.778,604.816 v1(436.778,596.646) ; C56.2@450,585 452.5,582.5 R99.1@457.5,582.5
  Bottom Layer w0.25: v1(436.778,596.646) 448.437,584.987 450,584.987 C56.2@450,585
NetC61_2: C61.2 DD9.157 R108.1 | length 224.7
  Top Layer w0.25: R108.1@527,595 527,595.884 527.508,596.392 531.311,596.392 538.644,603.724 538.644,641.336 v1(542.29,644.982) ; DD9.157@608.3,621.95 608.3,640.812 v1(608.305,640.817)
  Bottom Layer w0.25: v1(542.29,644.982) 551.307,653.999 595.63,653.999 ; v1(608.305,640.817) 600.735,640.817 595.173,646.379 595.173,653.542 595.63,653.999 ; C61.2@660,650 658.843,648.843 655.32,648.843 650.886,653.277 638.087,653.277 637.951,653.413 636.6,653.413 636.014,653.999 595.63,653.999
NetC63_2: C63.2 DD9.158 R109.1 | length 93.6
  Top Layer w0.25: v1(596.062,653.009) 596.07,653 R109.1@597.5,653 ; v1(607.416,644.652) 607.416,625.328 607.65,625.094 DD9.158@607.65,621.95
  Bottom Layer w0.25: v1(596.062,653.009) 596.162,652.909 615.672,652.909 ; v1(607.416,644.652) 615.672,652.909 ; C63.2@652.5,650 640.492,650 637.583,652.909 615.672,652.909
NetC90_2: C90.2 DD9.26 R169.2 | length 210.5
  Top Layer w0.25: DD9.26@601.8,601.4 v1(603.428,601.4) ; v1(615.95,602.691) 633.006,619.747 633.006,629.189 632.663,629.532 632.663,653.002 630.928,654.737 630.928,658.071 629.701,659.298 626.339,659.298 625.917,658.876 625.917,655.014 628.65,652.281 628.65,647.954 628.396,647.7 625.221,647.7 621.421,651.5 R169.2@620,651.5 619.055,651.5 v1(618.573,651.017)
  Bottom Layer w0.25: C90.2@527.5,630 529.064,631.564 604.285,631.564 618.573,645.853 v1(618.573,651.017) ; v1(603.428,601.4) 614.659,601.4 v1(615.95,602.691)
NetC129_1: C129.1 DD12.2 R170.2 R173.2 | length 114.6
  Top Layer w0.25: DD12.2@567.5,482.54 560.984,476.024 560.984,448.529 569.514,440 C129.1@575,440 576.012,438.988 586.105,438.988 586.842,439.725 586.842,460.96 589,463.118 R173.2@589,465 ; R170.2@586,480 586,478.565 v1(586.003,478.561)
  Bottom Layer w0.25: DD12.2@567.5,482.54 571.479,478.561 v1(586.003,478.561)
NetC132_1: C132.1 C133.1 DD12.5 DD12.7 L20.1 | length 56.9
  Top Layer w0.25: C133.1@554.5,455 C132.1@554.5,465 552.323,467.177 552.323,478.638 555,481.315 L20.1@555,483 560.959,483 561.882,483.923 573.737,483.923 DD12.7@575.12,482.54 576.021,481.639 576.021,478.361 DD12.5@575.12,477.46
NetC159_2: C159.2 DD16.13 R183.2 | length 58.9
  Top Layer w0.25: v1(680,468.815) 680,469.426 ; R183.2@680,472.5 680,469.426 ; DD16.13@700,466.3 691.871,466.3 691.196,466.975 682.452,466.975 680,469.426
  Bottom Layer w0.25: C159.2@650.5,460 671.185,460 672.094,460.909 672.094,462.28 672.465,462.651 673.836,462.651 v1(680,468.815)
NetC160_1: C160.1 DD16.7 R199.2 ZQ1.2 | length 80.9
  Top Layer w0.25: ZQ1.2@642.5,499.88 649,499.88 R199.2@651.5,497.38 652.12,498 C160.1@662.5,498 ; v1(703.402,483.217) 706.628,479.991 706.628,475.183 706.729,475.082 706.729,473.481 706.5,473.252 DD16.7@706.5,472.15
  Bottom Layer w0.25: C160.1@662.5,498 688.619,498 v1(703.402,483.217)
NetC161_1: C161.1 DD16.8 R199.1 ZQ1.1 | length 107
  Top Layer w0.25: ZQ1.1@642.5,495 644.88,497.38 R199.1@648.5,497.38 648.5,496.189 653.39,491.299 653.39,486.893 653.034,486.537 652.755,486.537 651.612,485.394 v1(651.612,476.606) ; DD16.8@705.85,472.15 v1(705.85,474.23)
  Bottom Layer w0.25: C161.1@637.5,480.5 636.6,479.6 636.6,477.012 637.007,476.606 v1(651.612,476.606) 699.16,476.606 701.536,474.23 v1(705.85,474.23)
NetC162_2: C162.2 DD16.14 R184.2 | length 63.6
  Top Layer w0.25: v1(680,461.179) R184.2@680,465 680,465.65 680.44,466.09 690.11,466.09 690.55,465.65 DD16.14@700,465.65
  Bottom Layer w0.25: C162.2@650.5,450 676.746,450 680,453.254 v1(680,461.179)
NetC163_1: C163.1 C165.2 C167.2 DD16.18 R198.1 R200.1 R201.1 | length 190.3
  Top Layer w0.25: v1(613.181,464.998) 613.184,465 C163.1@615,465 ; C167.2@637.5,455 638,455.5 C165.2@638,467.5 ; R198.1@662.5,415 669.148,415 ; R200.1@670,415 669.148,415 ; v1(676.073,454.5) 676.656,454.5 ; R201.1@677.5,454.5 676.656,454.5 ; DD16.18@700,463.05 v1(703.301,463.05) ; 669.148,415 668.858,415.29 668.858,420.268 676.073,427.483 676.073,453.917 676.656,454.5
  Bottom Layer w0.25: v1(613.181,464.998) 635.498,464.998 C165.2@638,467.5 ; C167.2@637.5,455 673.669,455 ; v1(676.073,454.5) 675.573,455 673.669,455 ; v1(703.301,463.05) 706.636,459.715 708.914,459.715 709.346,459.283 709.346,457.987 708.152,456.794 690.753,456.794 683.082,464.464 676.529,464.464 675.03,462.966 675.03,456.362 673.669,455
NetC164_1: C164.1 DD16.4 R195.1 | length 92.9
  Top Layer w0.25: DD16.4@708.45,472.15 708.45,470.681 707.136,469.367 706.202,469.367 705.612,468.777 705.612,467.71 706.47,466.852 707.448,466.852 711.683,471.086 711.683,494.39 R195.1@713,494.5 v1(711.573,494.5)
  Bottom Layer w0.25: v1(711.573,494.5) 728.573,477.5 C164.1@757,477.5
NetC166_1: C166.1 DD16.3 R194.1 | length 120.6
  Top Layer w0.25: R194.1@682.5,506 682.142,506 681.355,505.213 681.355,497.332 682.193,496.494 682.955,496.494 683.641,495.808 v1(683.641,475.361) ; v1(706.73,468.173) v1@709.1,470.543 ; DD16.3@709.1,472.15 v1@709.1,470.543 ; v1(709.438,470.205) v1@709.1,470.543
  Bottom Layer w0.25: v1(683.641,475.361) 699.541,475.361 v1(706.73,468.173) ; v1(709.438,470.205) 732.502,470.205 733.148,470.85 746.65,470.85 C166.1@760,457.5
NetC167_1: C167.1 DD16.19 R205.2 VD17.2 | length 91.6
  Top Layer w0.25: R205.2@622,467.5 VD17.2@622,460 622,458.419 625.419,455 C167.1@634.5,455 ; v1(673.329,456.108) 692.15,456.108 698.442,462.4 DD16.19@700,462.4
  Bottom Layer w0.25: C167.1@634.5,455 635.608,456.108 v1(673.329,456.108)
NetC168_1: C168.1 DD16.2 R193.1 | length 101.5
  Top Layer w0.25: R193.1@689,506 v1(690.492,506) ; DD16.2@709.75,472.15 v1(709.75,474.904)
  Bottom Layer w0.25: v1(690.492,506) 721.589,474.904 ; v1(709.75,474.904) 721.589,474.904 ; C168.1@760,467.5 753.104,474.396 722.097,474.396 721.589,474.904
NetC170_1: C170.1 R208.2 VT1.1 | length 198.3
  Top Layer w0.25: v1(695.071,508.991) 695.08,509 R208.2@696.5,509 ; VT1.1@717.5,428.75 v1(717.5,432.13)
  Bottom Layer w0.25: v1(695.071,508.991) 728.533,508.991 736.651,517.109 737.931,517.109 738.429,516.611 740.131,516.611 750.494,506.247 756.082,506.247 760,502.329 C170.1@760,487.5 774.878,472.622 774.878,457.2 773.862,456.184 758.647,456.184 734.593,432.13 v1(717.5,432.13)
NetDD1_2: DD1.2 DD1.3 | length 1.3
  Top Layer w0.25: DD1.2@431.23,430 DD1.3@432.5,430
NetDD1_4: DD1.4 R11.1 | length 31
  Top Layer w0.25: R11.1@417.5,446 417.5,433.959 418.592,432.867 432.703,432.867 433.77,431.8 DD1.4@433.77,430
NetDD1_11: DD1.11 DD1.12 | length 1.3
  Top Layer w0.25: DD1.12@432.5,436.2 DD1.11@433.77,436.2
NetDD4_2: DD4.2 R33.1 | length 55
  Top Layer w0.25: v1(405.994,473.589) 406,473.596 R33.1@406,475 ; v1(441.975,492.125) DD4.2@441.975,494.778
  Bottom Layer w0.25: v1(405.994,473.589) 404.617,474.966 404.617,482.722 414.02,492.125 v1(441.975,492.125)
NetDD4_3: DD4.3 R34.1 | length 56.6
  Top Layer w0.25: R34.1@412.5,466.5 412.5,486.363 v1(422.275,496.138) ; DD4.3@442.625,494.778 v1(442.625,496.388)
  Bottom Layer w0.25: v1(422.275,496.138) 429.493,496.138 430.724,497.369 435.552,497.369 436.533,496.388 v1(442.625,496.388)
NetDD4_4: DD4.4 R35.1 | length 68.5
  Top Layer w0.25: v1(415.032,466.5) R35.1@417.5,466.5 ; v1(443.275,492.912) DD4.4@443.275,494.778
  Bottom Layer w0.25: v1(415.032,466.5) 405.121,476.411 405.121,482.007 405.613,482.498 436.124,482.498 443.275,489.65 v1(443.275,492.912)
NetDD4_5: DD4.5 R36.1 | length 54.5
  Top Layer w0.25: R36.1@422.5,466.5 422.504,466.5 423.164,467.16 v1(423.164,497.23) ; DD4.5@443.925,494.778 v1(443.925,496.874)
  Bottom Layer w0.25: v1(423.164,497.23) 423.807,497.873 435.784,497.873 436.274,497.382 443.417,497.382 v1(443.925,496.874)
NetDD4_6: DD4.6 R37.1 | length 46.4
  Top Layer w0.25: R37.1@427.5,462 428.447,462 428.966,462.52 428.966,487.082 v1(432.13,490.245) ; v1(441.781,490.245) 442.365,490.245 444.575,492.456 DD4.6@444.575,494.778
  Bottom Layer w0.25: v1(432.13,490.245) v1(441.781,490.245)
NetDD4_7: DD4.7 R38.1 | length 53.3
  Top Layer w0.25: v1(432.181,495.986) 433.019,495.148 433.019,476.174 430.174,473.329 430.174,464.389 431.063,463.5 R38.1@432.5,463.5 ; DD4.7@445.225,494.778 445.225,495.619 v1(446.253,496.646)
  Bottom Layer w0.25: v1(432.181,495.986) 432.859,495.308 440.939,495.308 441.242,495.005 444.611,495.005 v1(446.253,496.646)
NetDD4_8: DD4.8 R39.1 | length 32.7
  Top Layer w0.25: R39.1@437.5,465.5 437.5,484.283 445.875,492.658 DD4.8@445.875,494.778
NetDD4_9: DD4.9 R40.1 | length 30.9
  Top Layer w0.25: R40.1@442.5,465.5 442.5,488.571 446.525,492.596 DD4.9@446.525,494.778
NetDD4_12: DD4.12 R41.1 | length 35.3
  Top Layer w0.25: R41.1@447.5,462.5 446.363,462.5 445.186,463.677 445.186,490.131 448.475,493.42 DD4.12@448.475,494.778
NetDD4_13: DD4.13 R42.1 | length 31.8
  Top Layer w0.25: DD4.13@449.125,494.778 449.125,467.358 451.483,465 R42.1@452.5,465
NetDD4_14: DD4.14 R43.1 | length 33.8
  Top Layer w0.25: DD4.14@449.775,494.778 449.775,491.388 451.079,490.084 451.079,469.589 455.168,465.5 R43.1@457.5,465.5
NetDD4_15: DD4.15 R44.1 | length 37.4
  Top Layer w0.25: DD4.15@450.425,494.778 450.425,492.22 455.041,487.604 v1(455.041,467.589) ; v1(461.061,465.5) R44.1@462.5,465.5
  Bottom Layer w0.25: v1(455.041,467.589) 458.972,467.589 v1(461.061,465.5)
NetDD4_16: DD4.16 R45.1 | length 40.1
  Top Layer w0.25: DD4.16@451.075,494.778 451.075,492.535 455.813,487.797 455.813,470.347 v1(456.26,469.9) ; v1(466.07,465.5) R45.1@467.5,465.5
  Bottom Layer w0.25: v1(456.26,469.9) 461.155,469.9 465.555,465.5 v1(466.07,465.5)
NetDD4_17: DD4.17 R46.1 | length 43.2
  Top Layer w0.25: DD4.17@451.725,494.778 451.725,492.825 456.692,487.858 v1(456.692,476.25) ; v1(471.576,471.145) 471.576,466.5 R46.1@472.5,466.5
  Bottom Layer w0.25: v1(456.692,476.25) 466.471,476.25 v1(471.576,471.145)
NetDD4_18: DD4.18 R47.1 | length 46.9
  Top Layer w0.25: DD4.18@452.375,494.778 452.375,493.7 457.886,488.189 v1(457.886,474.297) ; v1(476.072,463.5) R47.1@477.5,463.5
  Bottom Layer w0.25: v1(457.886,474.297) 465.319,466.864 472.708,466.864 v1(476.072,463.5)
NetDD4_19: DD4.19 R48.1 | length 74.1
  Top Layer w0.25: v1(452.009,497.535) 453.025,496.519 DD4.19@453.025,494.778 ; v1(474.777,489.28) 474.777,477.06 475.017,476.82 475.017,462.421 475.488,461.95 480.821,461.95 482.371,463.5 R48.1@482.5,463.5
  Bottom Layer w0.25: v1(452.009,497.535) 448.063,497.535 447.802,497.274 447.802,495.503 454.025,489.28 v1(474.777,489.28)
NetDD4_56: DD4.56 R24.2 | length 48.7
  Top Layer w0.25: R24.2@410,527.5 410,526.092 v1(413.791,522.3) ; v1(443.408,522.3) 443.925,521.783 DD4.56@443.925,510.222
  Bottom Layer w0.25: v1(413.791,522.3) v1(443.408,522.3)
NetDD4_57: DD4.57 R23.2 | length 52.5
  Top Layer w0.25: R23.2@410,522.5 410,508.083 v1(413.715,504.368) ; DD4.57@443.275,510.222 443.275,508.869 v1(443.281,508.864)
  Bottom Layer w0.25: v1(413.715,504.368) 414.97,505.622 435.229,505.622 438.47,508.864 v1(443.281,508.864)
NetDD4_64: DD4.64 L10.1 | length 90.3
  Top Layer w0.25: L10.1@396,455 396,454.99 420.446,454.99 424.612,459.156 424.612,498.932 434.588,508.908 436.327,508.908 438.511,506.725 DD4.64@439.778,506.725
NetDD4_65: DD4.65 L11.1 | length 94.6
  Top Layer w0.25: L11.1@396,445 396,446.913 402.502,453.415 419.862,453.415 425.196,458.749 425.196,497.998 433.045,505.846 433.045,506.095 434.594,507.644 436.321,507.644 437.891,506.075 DD4.65@439.778,506.075
NetDD4_66: DD4.66 L9.1 | length 80.7
  Top Layer w0.25: L9.1@396,465 396,464.007 v1(400.558,464.007) ; v1(436.016,474.091) 436.085,474.159 436.085,481.869 435.115,482.839 435.115,503.66 436.88,505.425 DD4.66@439.778,505.425
  Bottom Layer w0.25: v1(400.558,464.007) 402.133,465.582 417.855,465.582 425.856,473.583 435.635,473.583 436.016,473.964 v1(436.016,474.091)
NetDD4_67: DD4.67 L8.1 | length 67.2
  Top Layer w0.25: L8.1@395.5,475 v1(395.5,478.13) ; v1(437.845,493.37) 435.619,495.596 435.619,502.905 437.489,504.775 DD4.67@439.778,504.775
  Bottom Layer w0.25: v1(395.5,478.13) 398.77,478.13 414.01,493.37 v1(437.845,493.37)
NetDD4_70: DD4.70 R25.1 | length 65.2
  Top Layer w0.25: v1(409,511.581) R25.1@409,515 ; DD4.70@439.778,502.825 441.141,502.825 v1(441.655,502.31)
  Bottom Layer w0.25: v1(409,511.581) 400.583,503.165 400.583,500.38 404.216,496.748 419.532,496.748 421.161,498.377 438.154,498.377 439.496,500.151 v1(441.655,502.31)
NetDD4_71: DD4.71 R26.1 | length 36.1
  Top Layer w0.25: R26.1@408,510 408,508.559 v1(414.63,501.929) ; v1(437.109,502.183) 437.117,502.175 DD4.71@439.778,502.175
  Bottom Layer w0.25: v1(414.63,501.929) 436.855,501.929 v1(437.109,502.183)
NetDD4_72: DD4.72 R27.1 | length 44.8
  Top Layer w0.25: v1(409,503.58) R27.1@409,505 ; DD4.72@439.778,501.525 440.776,501.525 440.909,501.392 v1(443.56,501.392)
  Bottom Layer w0.25: v1(409,503.58) 409,502.682 410.286,501.396 411.429,501.396 412.877,502.844 418.973,502.844 419.419,503.29 437.169,503.29 438.081,504.201 442.787,504.201 443.56,503.428 v1(443.56,501.392)
NetDD4_73: DD4.73 R28.1 | length 34.4
  Top Layer w0.25: v1(409,498.078) R28.1@409,500 ; v1(438.277,500.367) 438.785,500.875 DD4.73@439.778,500.875
  Bottom Layer w0.25: v1(409,498.078) 409.803,498.881 437.743,498.881 438.277,499.415 v1(438.277,500.367)
NetDD4_74: DD4.74 R29.1 | length 46.6
  Top Layer w0.25: R29.1@409,495 409,494.995 v1(410.845,494.995) ; DD4.74@439.778,500.225 v1(441.147,500.225)
  Bottom Layer w0.25: v1(410.845,494.995) 411.109,495.259 430.565,495.259 431.292,495.986 431.292,496.357 431.8,496.865 432.826,496.865 433.843,495.848 441.407,495.848 441.746,495.509 444.106,495.509 445.1,496.503 445.1,497.915 444.991,498.025 441.838,498.025 441.147,498.715 v1(441.147,500.225)
NetDD4_75: DD4.75 R30.1 | length 35.7
  Top Layer w0.25: R30.1@409,490 409,490.982 417.941,499.923 v1(418.338,499.923) ; v1(436.753,499.923) 437.21,499.466 439.107,499.466 439.217,499.575 DD4.75@439.778,499.575
  Bottom Layer w0.25: v1(418.338,499.923) v1(436.753,499.923)
NetDD4_76: DD4.76 R31.1 | length 62.7
  Top Layer w0.25: R31.1@409,485 408.432,485 408.153,485.279 408.153,496.138 413.436,496.138 417.424,500.126 v1(417.424,503.794) ; DD4.76@439.778,498.925 441.448,498.925 441.956,499.433 v1(443.459,499.433)
  Bottom Layer w0.25: v1(417.424,503.794) 436.628,503.794 437.54,504.706 443.295,504.706 444.439,503.561 444.439,500.414 v1(443.459,499.433)
NetDD4_77: DD4.77 R32.1 | length 64.3
  Top Layer w0.25: v1(409,478.571) R32.1@409,480 ; v1(435.204,480.619) 435.127,480.543 435.127,473.456 435.508,473.075 436.372,473.075 436.905,473.608 436.905,489.356 438.734,491.185 438.734,495.757 438.709,495.783 438.709,498.275 DD4.77@439.778,498.275
  Bottom Layer w0.25: v1(409,478.571) 411.048,480.619 v1(435.204,480.619)
NetDD6_3: DD6.3 R49.2 | length 7.6
  Top Layer w0.25: DD6.3@375,687.62 375.5,688.12 R49.2@375.5,695
NetDD6_5: DD6.5 R51.1 R53.2 VD13.2 | length 21.8
  Top Layer w0.25: R51.1@361,685 361,683.999 364,680.999 R53.2@364,680 DD6.5@372.46,680 372.46,676.54 VD13.2@375,674
NetDD6_6: DD6.6 R50.1 R52.2 VD12.2 | length 35.1
  Top Layer w0.25: R50.1@361,690 361,693.837 ; R52.2@361,695 361,693.837 ; VD12.2@380,674 379.403,674 379.403,675.597 DD6.6@375,680 375,683.291 366.166,692.125 362.712,692.125 361,693.837
NetDD7_8: DD7.8 R56.1 R62.2 | length 29
  Top Layer w0.25: R62.2@389,645 R56.1@389,640 389.701,640.701 411.872,640.701 411.872,640.6 DD7.8@412.65,640.6
NetDD7_9: DD7.9 R57.1 R62.1 | length 40.2
  Top Layer w0.25: R62.1@386,645 386,643.284 387.807,641.477 387.807,634.766 389,633.573 R57.1@389,635 389,635.381 393.816,640.197 411.368,640.197 411.615,639.95 DD7.9@412.65,639.95
NetDD7_10: DD7.10 R73.1 | length 64.9
  Top Layer w0.25: R73.1@373.5,645 373.5,643.592 v1(373.507,643.585) ; v1(410.489,639.318) 410.507,639.3 DD7.10@412.65,639.3
  Bottom Layer w0.25: v1(373.507,643.585) 373.507,648.756 375.144,650.392 376.987,650.392 381.001,646.378 381.001,642.112 382.195,640.918 413.512,640.918 415.163,639.267 415.163,638.2 414.528,637.565 412.242,637.565 v1(410.489,639.318)